# Altium PCB WSBD_FlexBoard.PcbDoc
Units mm, origin at the board's own origin, x right, y up, seen from the top; angles counter-clockwise.
Board outline 363.3 x 25 mm, 2 copper layers (Top Layer, Bottom Layer), stack 0.049 mm thick; 6 components, 14 nets, 74 pads, 515 vias.
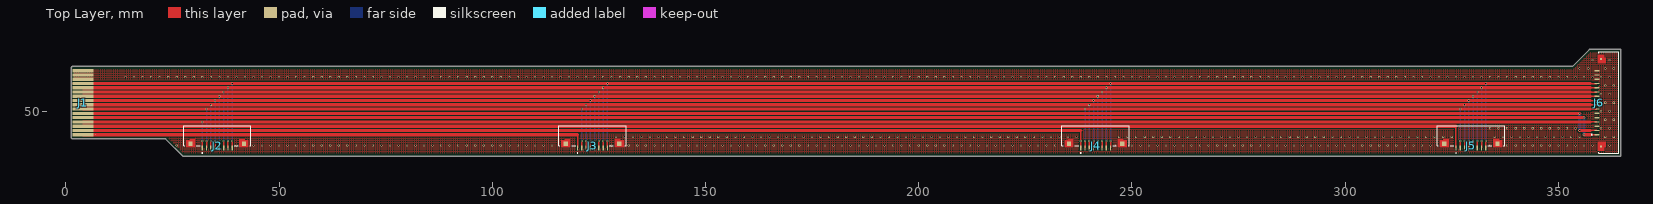
[diagram p0: Top Layer view]
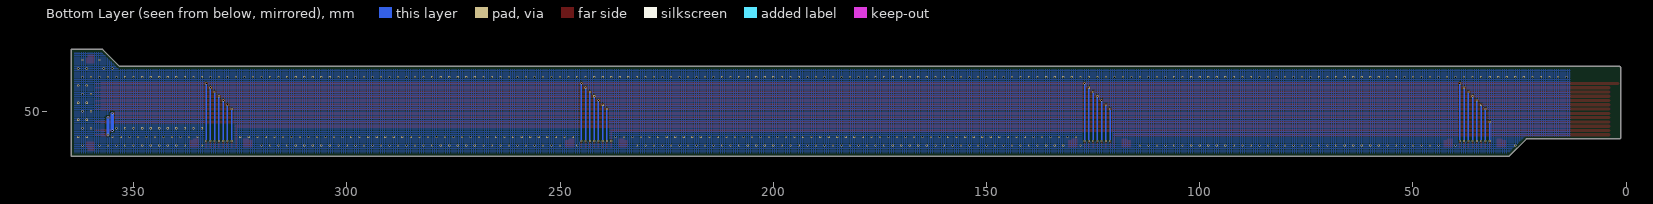
[diagram p1: Bottom Layer view, seen from below]
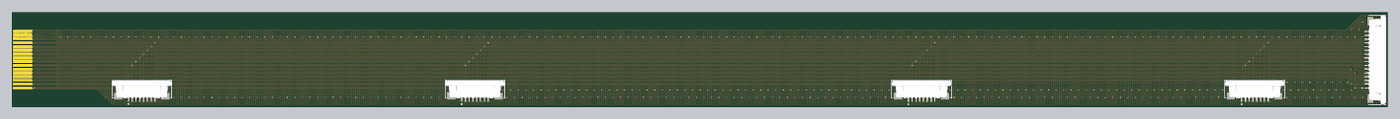
[diagram p2: 3D render of the assembled board from above, using the file's embedded part models]

## Layer stack, top to bottom
Top Solder: solder mask 0.025, SM-001, Dk 4
Top Layer: signal copper 0.012
Dielectric 1: core 0.025, Core-043, Dk 4.3
Bottom Layer: signal copper 0.012
Bottom Solder: solder mask 0.025, SM-001, Dk 4

## Board outline
1.6,43.5 cw(c1.6,43.8) 1.3,43.8 1.3,60.2 cw(c1.6,60.2) 1.6,60.5 353.3,60.5 357.3,64.5 364.6,64.5 364.6,39.5 27.4,39.5 23.4,43.5

## Design rules (kind name [scope] priority, off if disabled: settings)
BoardOutlineClearance [All] p1: gap=0.254 ignorepadtopadclearanceinfootprint=FALSE except(0: Arc-SplitContinuation Track-SplitContinuation SMDPad-SplitContinuation THPad-SplitContinuation Via-SplitContinuation Fill-SplitContinuation Poly-SplitContinuation Region-SplitContinuation Text-SplitContinuation; 0.2: SMDPad-OutlineEdge; 0.5: Poly-OutlineEdge)
Clearance [All] p1: gap=0.102 ignorepadtopadclearanceinfootprint=TRUE except(0.25: Arc-Fill Arc-Poly Arc-Region Track-Fill Track-Poly Track-Region)
MinimumSolderMaskSliver [All] p1: minsoldermaskwidth=0
PlaneConnect PlaneConnect_1 [All] p1: planeconnectstyle=Relief reliefexpansion=0.508 reliefentries=4 reliefconductorwidth=0.254 reliefairgap=0.254
PolygonConnect [All] p1: connectstyle=Direct reliefconductorwidth=0.254 reliefentries=4 polygonreliefangle="90 Angle" airgapwidth=0.254
RoutingVias [All] p1: holewidth=0.3 width=0.5 viastyle="Through Hole" minholewidth=0.3 minwidth=0.5 maxholewidth=0.3 maxwidth=0.5
SolderMaskExpansion [All] p1: expansion=0.102 istentingtop=FALSE
Width [All] p1: maxlimit=2 minlimit=0.102 preferedwidth=0.4 minimp=50.000000 maximp=50.000000 favimp=50.000000
28 further rules are at their usual default settings.

## Components (designator, comment, footprint, x,y, rotation, side; value= is the part's Value field where it differs from the comment)
J1 "FPC 16P 1mm" "6pin FPC 1mm" 4,44.5 r90 top
J2 "F52R-1A7H1-11008" F52R-1A7H1-11008 35.5,44.2 r180 top
J3 "F52R-1A7H1-11008" F52R-1A7H1-11008 123.5,44.2 r180 top
J4 "F52R-1A7H1-11008" F52R-1A7H1-11008 241.5,44.2 r180 top
J5 "F52R-1A7H1-11008" F52R-1A7H1-11008 329.5,44.2 r180 top
J6 "F52Q-1A7H1-11016" F52Q-1A7H1-11016 361.85,52 r90 top

## Footprints (in the part's own frame and the unit in brackets; to place one, negate y for a bottom-side part, rotate by r counter-clockwise, add the part's x,y. Pads: shape width x height; smd on the part's side, far side on the other; paste and mask are expansions set on the pad)
"6pin FPC 1mm" [mm]
  rect 0.75x5 smd paste-2539.97: 1(0,0) 2(1,0) 3(2,0) 4(3,0) 5(4,0) 6(5,0) 7(6,0) 8(7,0) 9(8,0) 10(9,0) 11(10,0) 12(11,0) 13(12,0) 14(13,0) 15(14,0) 16(15,0)
  silkscreen extent -0.01,-3.01 0.01,-2.99
F52Q-1A7H1-11016 [mm]
  rect 0.3x1.1 smd: 1(-7.5,2.8) 2(-6.5,2.8) 3(-5.5,2.8) 4(-4.5,2.8) 5(-3.5,2.8) 6(-2.5,2.8) 7(-1.5,2.8) 8(-0.5,2.8) 9(0.5,2.8) 10(1.5,2.8) 11(2.5,2.8) 12(3.5,2.8) 13(4.5,2.8) 14(5.5,2.8) 15(6.5,2.8) 16(7.5,2.8)
  rect 0.5x0.5 smd paste-1 mask+0: S1(-10.25,1.85) S2(10.25,1.85)
  Top Layer region: -9.2,0.7 -10.5,0.7 -10.5,1.05 -11.3,1.05 -11.3,2.65 -9.2,2.65
  Top Layer region: 11.3,1.05 10.5,1.05 10.5,0.7 9.2,0.7 9.2,2.65 11.3,2.65
  silkscreen extent -11.9,-2.35 11.9,4.1, body extent -11.9,-2.35 11.9,3.15, height 2.05
F52R-1A7H1-11008 [mm] "F52R-1A7H1-11008"
  rect 0.3x1.1 smd mask+0.05: 1(3.5,2.8) 2(2.5,2.8) 3(1.5,2.8) 4(0.5,2.8) 5(-0.5,2.8) 6(-1.5,2.8) 7(-2.5,2.8) 8(-3.5,2.8)
  rect 1x1 smd paste-1 mask+0: S1(-6.25,1.85) S2(6.25,1.85)
  Top Layer region: 7.3,1.05 6.5,1.05 6.5,0.7 5.2,0.7 5.2,2.65 7.3,2.65
  Top Layer region: -5.2,0.7 -6.5,0.7 -6.5,1.05 -7.3,1.05 -7.3,2.65 -5.2,2.65
  silkscreen extent -7.9,-2.35 7.9,4.09, body extent -7.9,-2.35 7.9,3.15, height 2.05

## Part data
J1: library part CMP-03085-5, "CONN FPC 16POS 1mm"
J2 J3 J4 J5: library part CMP-03084-2, "CONN FPC TOP 8POS 1mm", Manufacturer="Amphenol ICC (FCI)", Supplier2 Part Number=649-F52R-1A7H1-11008, Supplier Part Number=609-F52R-1A7H1-11008CT-ND, Manufacturer Part Number=F52R-1A7H1-11008, Supplier=Digi-Key, Supplier2=Mouser
J6: library part CMP-03079-1, "CONN FPC TOP 16POS 1mm", Manufacturer="Amphenol ICC (FCI)", Supplier2 Part Number=649-F52Q-1A7H1-11016, Supplier Part Number=609-F52Q-1A7H1-11016CT-ND, Manufacturer Part Number=F52Q-1A7H1-11016, Supplier=Digi-Key, Supplier2=Mouser

## Via types
v1: diameter 0.5, hole 0.3, Top Layer to Bottom Layer, tented both sides, 515 vias

## Nets (pads, with @x,y where several pads share a name; then routed paths per layer and width w, separated by ;. In a path a pad name is that pad's centre, name@x,y a point inside that pad or via, vN(x,y) a via of type N, cw(c..) or ccw(c..) an arc to the next point about the centre after c; other vN are vias at no path point)
EP_COM_OLR: J1.2 J4.1 | length 238.1
  Top Layer w0.3: J4.1 v1(238,43) 238,45.5
  Top Layer w0.75: J1.2 238,45.5
EP_COM_OR: J1.6 J6.2 | length 359
  Top Layer w0.3: 357.5,45.5 J6.2
  Top Layer w0.75: J1.6 v1(355,49.5) ; v1(355,45.5) 357.5,45.5
  Bottom Layer w0.75: v1(355,45.5) v1(355,49.5)
EP_COM_SL: J1.3 J5.1 | length 327.1
  Top Layer w0.3: J5.1 326,43 326,46.5
  Top Layer w0.75: J1.3 326,46.5
EP_COM_SR: J1.4 J2.1 J6.4 | length 361.1
  Top Layer w0.3: J2.1 v1(32,43) ; 357.5,47.5 J6.4
  Top Layer w0.75: J1.4 357.5,47.5
  Bottom Layer w0.3: v1(32,43) v1(32,47.5)
EP_COM_TLR: J1.1 J3.1 | length 119.1
  Top Layer w0.3: J3.1 120,43 120,44.5
  Top Layer w0.75: J1.1 120,44.5
EP_COM_TR: J1.5 J6.1 | length 359
  Top Layer w0.3: 357.5,44.5 J6.1
  Top Layer w0.75: J1.5 v1(356,48.5) ; v1(356,44.5) 357.5,44.5
  Bottom Layer w0.75: v1(356,44.5) v1(356,48.5)
EP_SEG_A: J1.9 J2.4 J3.4 J4.4 J5.4 J6.9 | length 399.4
  Top Layer w0.3: J2.4 v1(35,43) ; J3.4 v1(123,43) ; J4.4 v1(241,43) ; J5.4 v1(329,43) ; 357.5,52.5 J6.9
  Top Layer w0.75: J1.9 357.5,52.5
  Bottom Layer w0.3: v1(35,43) v1(35,52.5) ; v1(123,43) v1(123,52.5) ; v1(241,43) v1(241,52.5) ; v1(329,43) v1(329,52.5)
EP_SEG_B: J1.13 J2.8 J3.8 J4.8 J5.8 J6.13 | length 417.5
  Top Layer w0.3: J2.8 v1(39,43) ; J3.8 v1(127,43) ; J4.8 v1(245,43) ; J5.8 v1(333,43) ; 357.5,56.5 J6.13
  Top Layer w0.75: J1.13@1.929,56.5 J1.13 v1(39,56.5) v1(127,56.5) v1(245,56.5) v1(333,56.5) 357.5,56.5
  Bottom Layer w0.3: v1(39,43) v1(39,56.5) ; v1(127,43) v1(127,56.5) ; v1(245,43) v1(245,56.5) ; v1(333,43) v1(333,56.5)
EP_SEG_C: J1.12 J2.7 J3.7 J4.7 J5.7 J6.12 | length 411.4
  Top Layer w0.3: J2.7 v1(38,43) ; J3.7 v1(126,43) ; J4.7 v1(244,43) ; J5.7 v1(332,43) ; 357.5,55.5 J6.12
  Top Layer w0.75: J1.12 357.5,55.5
  Bottom Layer w0.3: v1(38,43) v1(38,55.5) ; v1(126,43) v1(126,55.5) ; v1(244,43) v1(244,55.5) ; v1(332,43) v1(332,55.5)
EP_SEG_D: J1.10 J2.5 J3.5 J4.5 J5.5 J6.10 | length 403.4
  Top Layer w0.3: J2.5 v1(36,43) ; J3.5 v1(124,43) ; J4.5 v1(242,43) ; J5.5 v1(330,43) ; 357.5,53.5 J6.10
  Top Layer w0.75: J1.10 357.5,53.5
  Bottom Layer w0.3: v1(36,43) v1(36,53.5) ; v1(124,43) v1(124,53.5) ; v1(242,43) v1(242,53.5) ; v1(330,43) v1(330,53.5)
EP_SEG_E: J1.8 J2.3 J3.3 J4.3 J5.3 J6.8 | length 395.5
  Top Layer w0.3: J2.3 v1(34,43) ; J3.3 v1(122,43) ; J4.3 v1(240,43) ; J5.3 v1(328,43) ; 357.5,51.5 J6.8
  Top Layer w0.75: J1.8 357.5,51.5
  Bottom Layer w0.3: v1(34,43) v1(34,51.5) ; v1(122,43) v1(122,51.5) ; v1(240,43) v1(240,51.5) ; v1(328,43) v1(328,51.5)
EP_SEG_F: J1.7 J2.2 J3.2 J4.2 J5.2 J6.7 | length 391.4
  Top Layer w0.3: J2.2 v1(33,43) ; J3.2 v1(121,43) ; J4.2 v1(239,43) ; J5.2 v1(327,43) ; 357.5,50.5 J6.7
  Top Layer w0.75: J1.7 357.5,50.5
  Bottom Layer w0.3: v1(33,43) v1(33,50.5) ; v1(121,43) v1(121,50.5) ; v1(239,43) v1(239,50.5) ; v1(327,43) v1(327,50.5)
EP_SEG_G: J1.11 J2.6 J3.6 J4.6 J5.6 J6.11 | length 407.4
  Top Layer w0.3: J2.6 v1(37,43) ; J3.6 v1(125,43) ; J4.6 v1(243,43) ; J5.6 v1(331,43) ; 357.5,54.5 J6.11
  Top Layer w0.75: J1.11 357.5,54.5
  Bottom Layer w0.3: v1(37,43) v1(37,54.5) ; v1(125,43) v1(125,54.5) ; v1(243,43) v1(243,54.5) ; v1(331,43) v1(331,54.5)
GND: J1.14 J1.15 J1.16 J6.14 J6.15 J6.16
  other v1: 26,42 40,42 44,42 46,42 48,42 50,42 52,42 54,42 56,42 58,42 60,42 62,42 64,42 66,42 68,42 70,42 72,42 74,42 76,42 78,42 80,42 82,42 84,42 86,42 88,42 90,42 92,42 94,42 96,42 98,42 100,42 102,42 104,42 106,42 108,42 110,42 112,42 114,42 128,42 132,42 134,42 136,42 138,42 140,42 142,42 144,42 146,42 148,42 150,42 152,42 154,42 156,42 158,42 160,42 162,42 164,42 166,42 168,42 170,42 172,42 174,42 176,42 178,42 180,42 182,42 184,42 186,42 188,42 190,42 192,42 194,42 196,42 198,42 200,42 202,42 204,42 206,42 208,42 210,42 212,42 214,42 216,42 218,42 220,42 222,42 224,42 226,42 228,42 230,42 232,42 246,42 250,42 252,42 254,42 256,42 258,42 260,42 262,42 264,42 266,42 268,42 270,42 272,42 274,42 276,42 278,42 280,42 282,42 284,42 286,42 288,42 290,42 292,42 294,42 296,42 298,42 300,42 302,42 304,42 306,42 308,42 310,42 312,42 314,42 316,42 318,42 320,42 334,42 338,42 340,42 342,42 344,42 346,42 348,42 350,42 352,42 354,42 356,42 358,42 362,42 129,44 131,44 133,44 135,44 137,44 139,44 141,44 143,44 145,44 147,44 149,44 151,44 153,44 155,44 157,44 159,44 161,44 163,44 165,44 167,44 169,44 171,44 173,44 175,44 177,44 179,44 181,44 183,44 185,44 187,44 189,44 191,44 193,44 195,44 197,44 199,44 201,44 203,44 205,44 207,44 209,44 211,44 213,44 215,44 217,44 219,44 221,44 223,44 225,44 227,44 229,44 231,44 233,44 235,44 237,44 247,44 249,44 251,44 253,44 255,44 257,44 259,44 261,44 263,44 265,44 267,44 269,44 271,44 273,44 275,44 277,44 279,44 281,44 283,44 285,44 287,44 289,44 291,44 293,44 295,44 297,44 299,44 301,44 303,44 305,44 307,44 309,44 311,44 313,44 315,44 317,44 319,44 321,44 323,44 325,44 335,44 337,44 339,44 341,44 343,44 345,44 347,44 349,44 351,44 353,44 355,44 361,44 363,44 334,46 336,46 338,46 340,46 342,46 344,46 346,46 348,46 350,46 352,46 354,46 360,46 362,46 361,48 363,48 360,50 362,50 361,52 363,52 360,54 362,54 361,56 363,56 14,58 16,58 18,58 20,58 22,58 24,58 26,58 28,58 30,58 32,58 34,58 36,58 38,58 40,58 42,58 44,58 46,58 48,58 50,58 52,58 54,58 56,58 58,58 60,58 62,58 64,58 66,58 68,58 70,58 72,58 74,58 76,58 78,58 80,58 82,58 84,58 86,58 88,58 90,58 92,58 94,58 96,58 98,58 100,58 102,58 104,58 106,58 108,58 110,58 112,58 114,58 116,58 118,58 120,58 122,58 124,58 126,58 128,58 130,58 132,58 134,58 136,58 138,58 140,58 142,58 144,58 146,58 148,58 150,58 152,58 154,58 156,58 158,58 160,58 162,58 164,58 166,58 168,58 170,58 172,58 174,58 176,58 178,58 180,58 182,58 184,58 186,58 188,58 190,58 192,58 194,58 196,58 198,58 200,58 202,58 204,58 206,58 208,58 210,58 212,58 214,58 216,58 218,58 220,58 222,58 224,58 226,58 228,58 230,58 232,58 234,58 236,58 238,58 240,58 242,58 244,58 246,58 248,58 250,58 252,58 254,58 256,58 258,58 260,58 262,58 264,58 266,58 268,58 270,58 272,58 274,58 276,58 278,58 280,58 282,58 284,58 286,58 288,58 290,58 292,58 294,58 296,58 298,58 300,58 302,58 304,58 306,58 308,58 310,58 312,58 314,58 316,58 318,58 320,58 322,58 324,58 326,58 328,58 330,58 332,58 334,58 336,58 338,58 340,58 342,58 344,58 346,58 348,58 350,58 352,58 354,58 356,58 358,58 360,58 362,58 355,60 357,60 361,60 363,60 358,62 362,62
pads on no net: J2.S1 J2.S2 J3.S1 J3.S2 J4.S1 J4.S2 J5.S1 J5.S2 J6.3 J6.5 J6.6 J6.S1 J6.S2

## Polygon pours and split planes (outlines as drawn)
GND on Top Layer "GND_L01_P001" (hatched 90Degree grid 0.508 track 0.203, remove dead copper, pour order 1): 0,63.1 354.1,63.1 357.7,66.7 365,66.7 365,38.1 364.6,37.7 0,37.7
GND on Bottom Layer "GND_L02_P000" (hatched 90Degree grid 0.508 track 0.203, remove dead copper, pour order 0): 13.1,63.1 354.1,63.1 357.7,66.7 365,66.7 365,38.1 364.6,37.7 13.1,37.7

## Silkscreen, mask and mechanical layers (free items; w line width, h text height)
Board Shape:
  lines w0.1: 1.3,43.8 ccw(c1.6,43.8) 1.6,43.5 4,43.5 23.4,43.5 27.4,39.5 364.6,39.5 364.6,64.5 357.3,64.5 353.3,60.5 1.6,60.5 ccw(c1.6,60.2) 1.3,60.2 1.3,43.8
Assembly Notes:
  lines w0.1: 8,55 63,55 63,135.2 8,135.2 8,55 ; 26,48.5 45,48.5 45,55 26,55 26,48.5 ; 31,42.6 40,42.6 40,48.5 31,48.5 31,42.6 ; 66,55 181,55 181,239 66,239 66,55 ; 114,48.5 133,48.5 133,55 114,55 114,48.5 ; 119,42.6 128,42.6 128,48.5 119,48.5 119,42.6 ; 184,55 299,55 299,239 184,239 184,55 ; 232,48.5 251,48.5 251,55 232,55 232,48.5 ; 237,42.6 246,42.6 246,48.5 237,48.5 237,42.6 ; 302,55 357,55 357,135.2 302,135.2 302,55 ; 320,48.5 339,48.5 339,55 320,55 320,48.5 ; 325,42.6 334,42.6 334,48.5 325,48.5 325,42.6
Stiffener_Bot:
  lines w0.2: 1.3,43.5 7.3,43.5 7.3,60.5 1.3,60.5 1.3,43.5 ; 27.4,39.5 43.6,39.5 43.6,46.8 27.4,46.8 27.4,39.5 ; 115.4,39.5 131.6,39.5 131.6,46.8 115.4,46.8 115.4,39.5 ; 233.4,39.5 249.6,39.5 249.6,46.8 233.4,46.8 233.4,39.5 ; 321.4,39.5 337.6,39.5 337.6,46.8 321.4,46.8 321.4,39.5 ; 357.3,39.5 364.6,39.5 364.6,64.5 357.3,64.5 357.3,39.5
  text "7.3*25 Polyimide Stiffener Bot / T = 0.2" at 353.885,65.244 h1
  text "6*17 Polyimide Stiffener Bot / T = 0.2" at 0,61.189 h1
  text "16.2*7.3 Polyimide Stiffener Bot / T = 0.2" at 26.65,32.744 h1
  text "16.2*7.3 Polyimide Stiffener Bot / T = 0.2" at 114.65,32.744 h1
  text "16.2*7.3 Polyimide Stiffener Bot / T = 0.2" at 232.65,32.744 h1
  text "16.2*7.3 Polyimide Stiffener Bot / T = 0.2" at 320.65,32.744 h1